# Altium PCB ESP8266 PCB.PcbDoc
Units mm, origin at the board's own origin, x right, y up, seen from the top; angles counter-clockwise.
Board outline 47.2 x 57.63 mm, 2 copper layers (Top Layer, Bottom Layer), stack 0.27 mm thick; 26 components, 15 nets, 95 pads, 50 vias.
Unrouted connection lines stored in the file: 1.
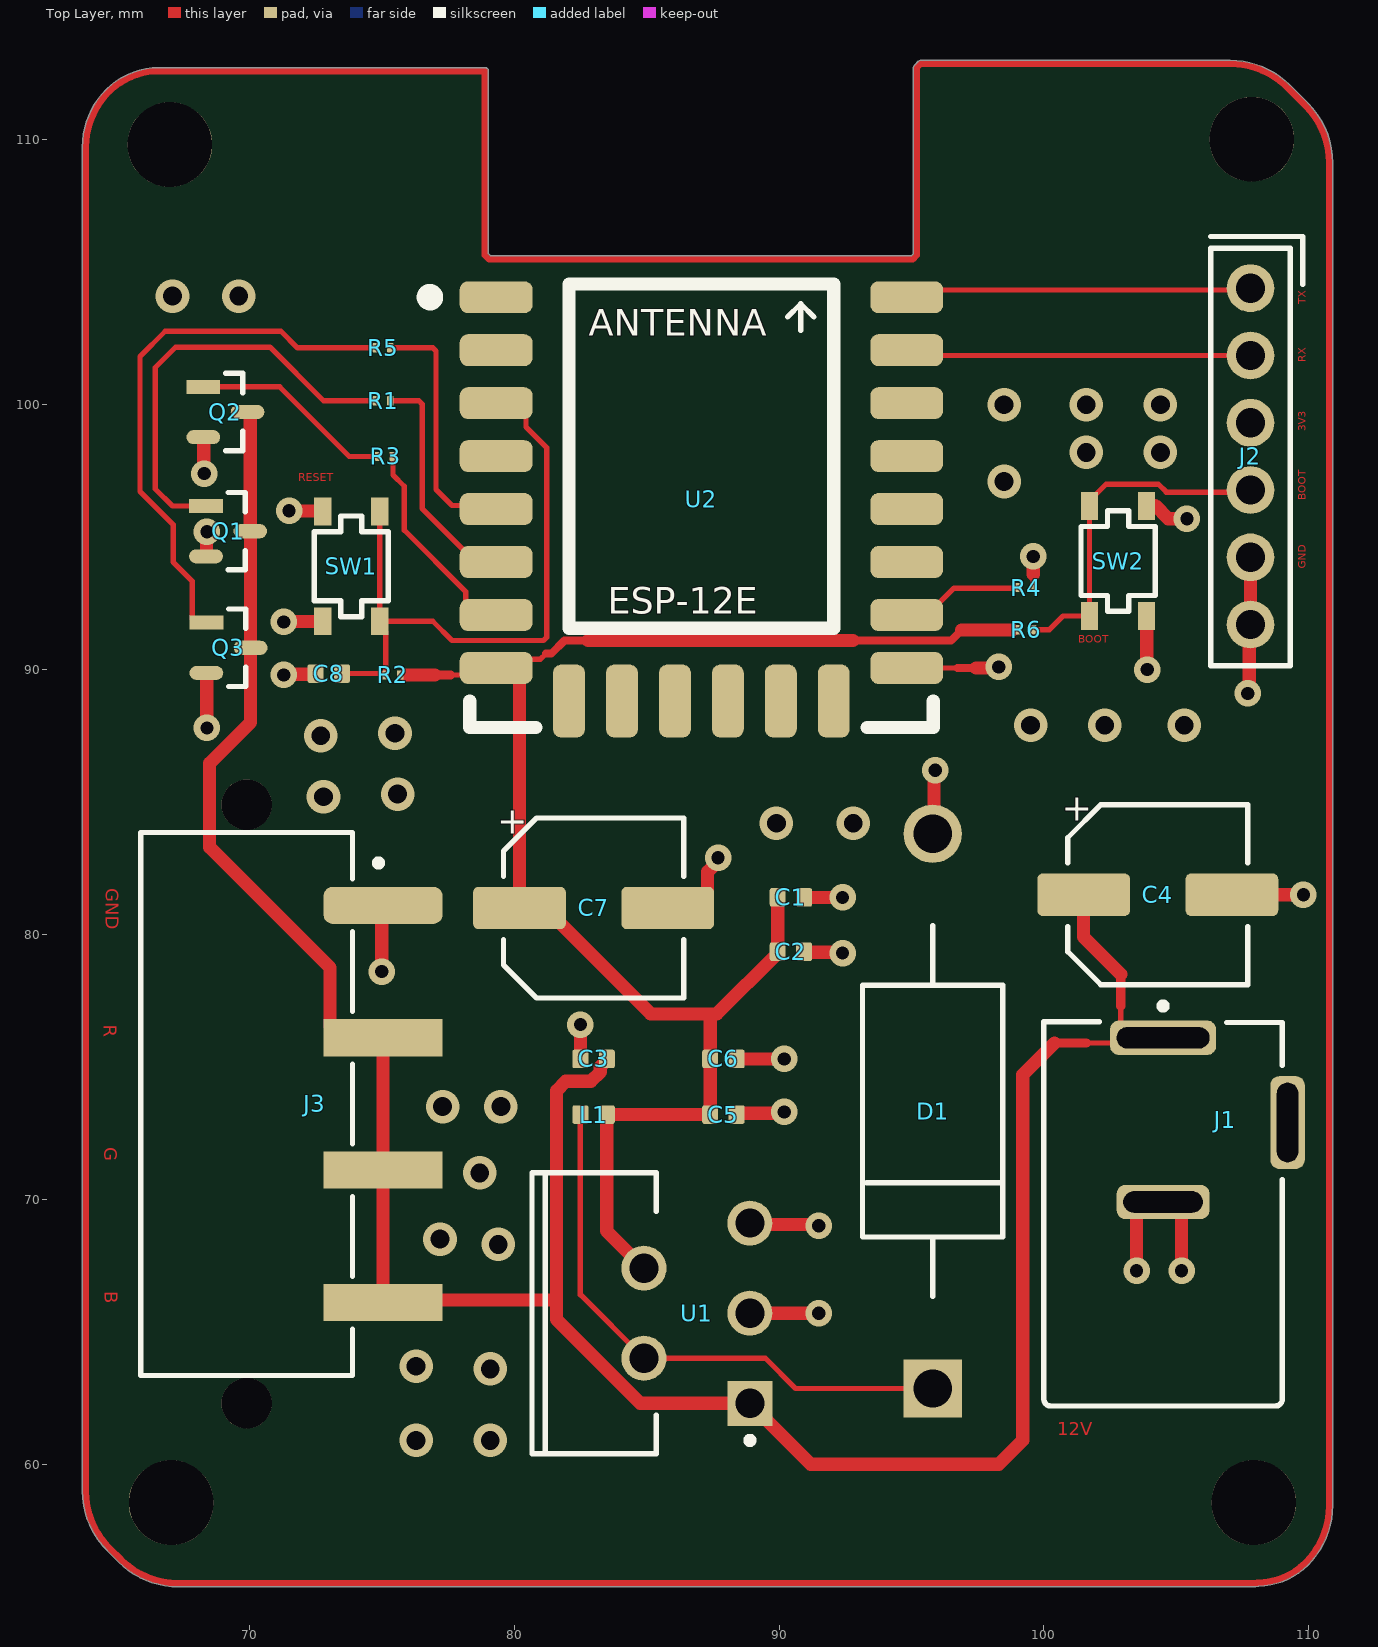
[diagram p0: Top Layer view]
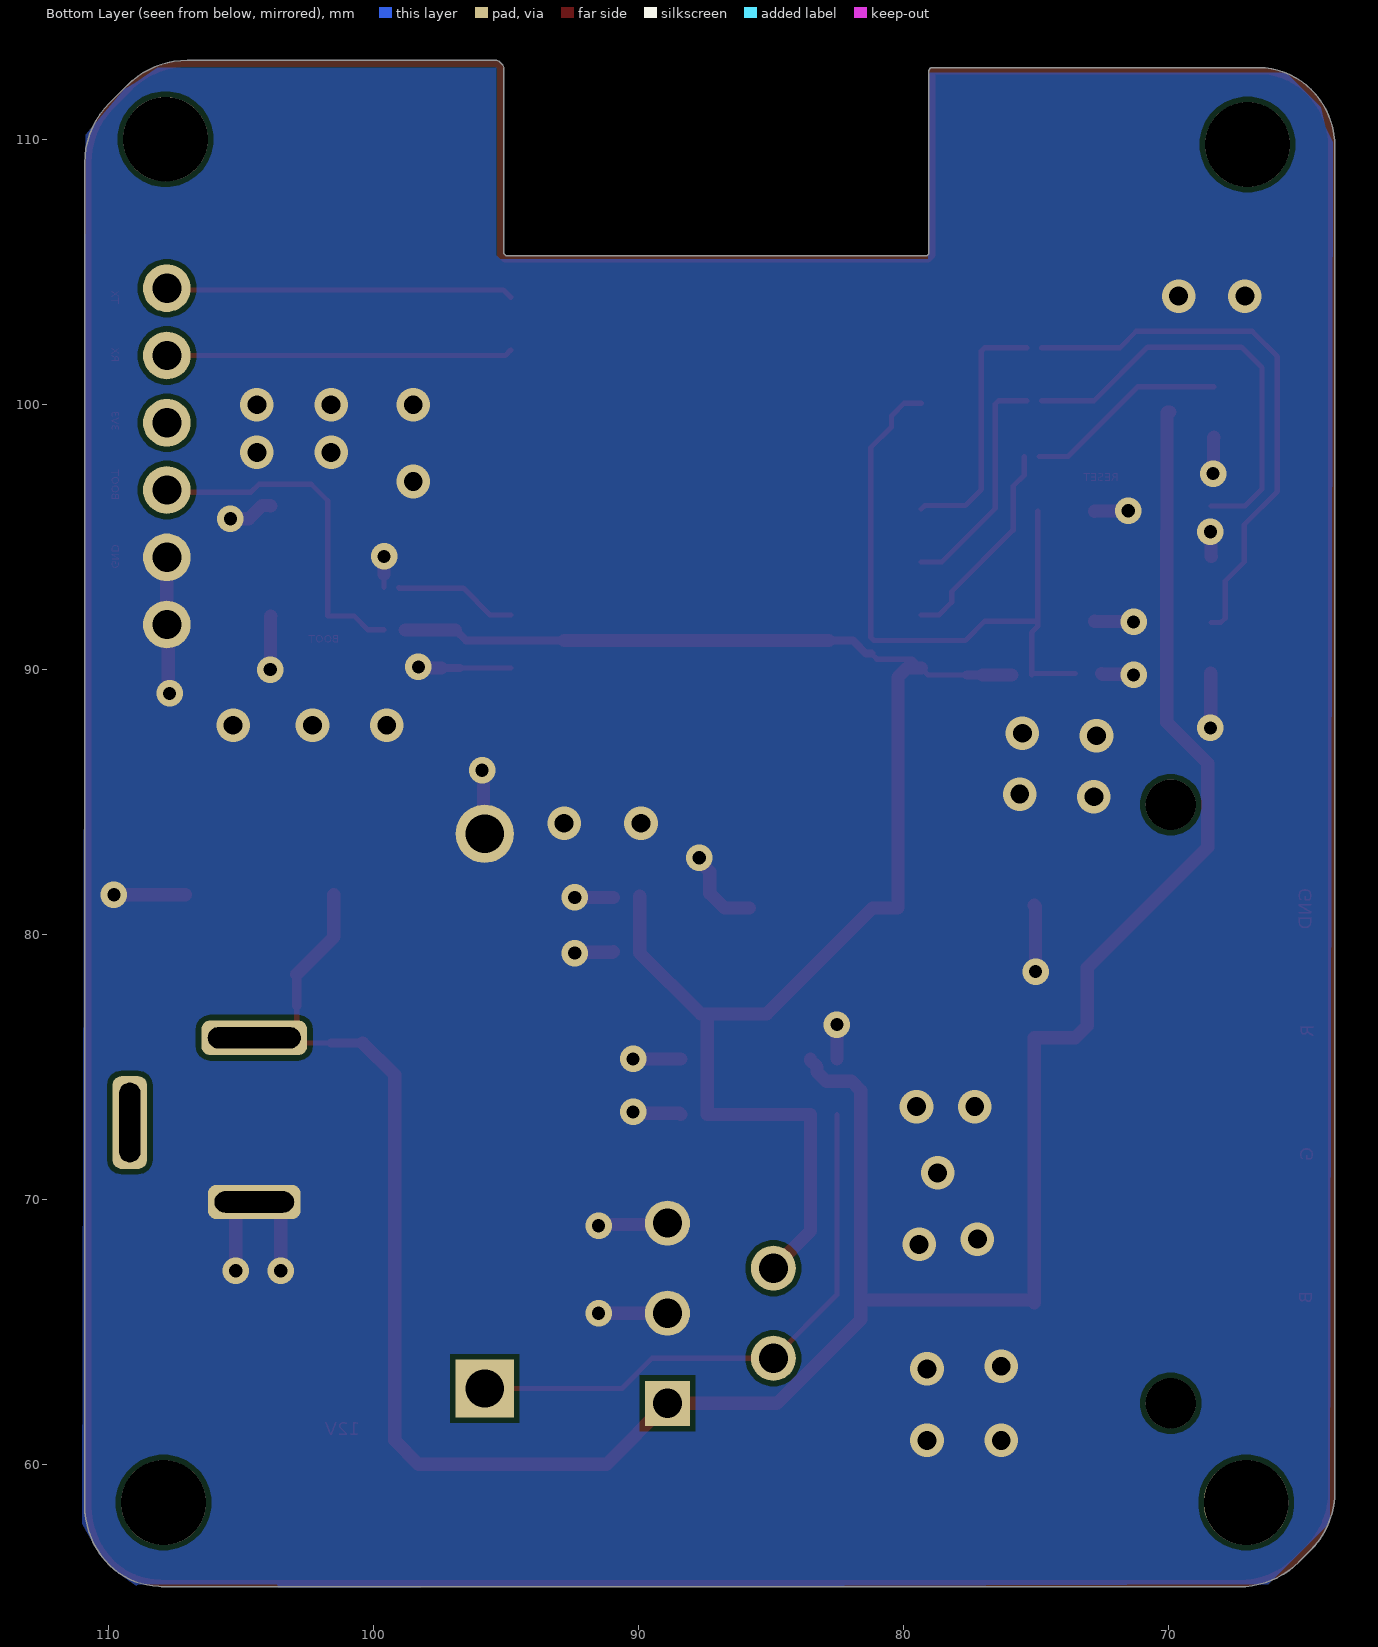
[diagram p1: Bottom Layer view, seen from below]
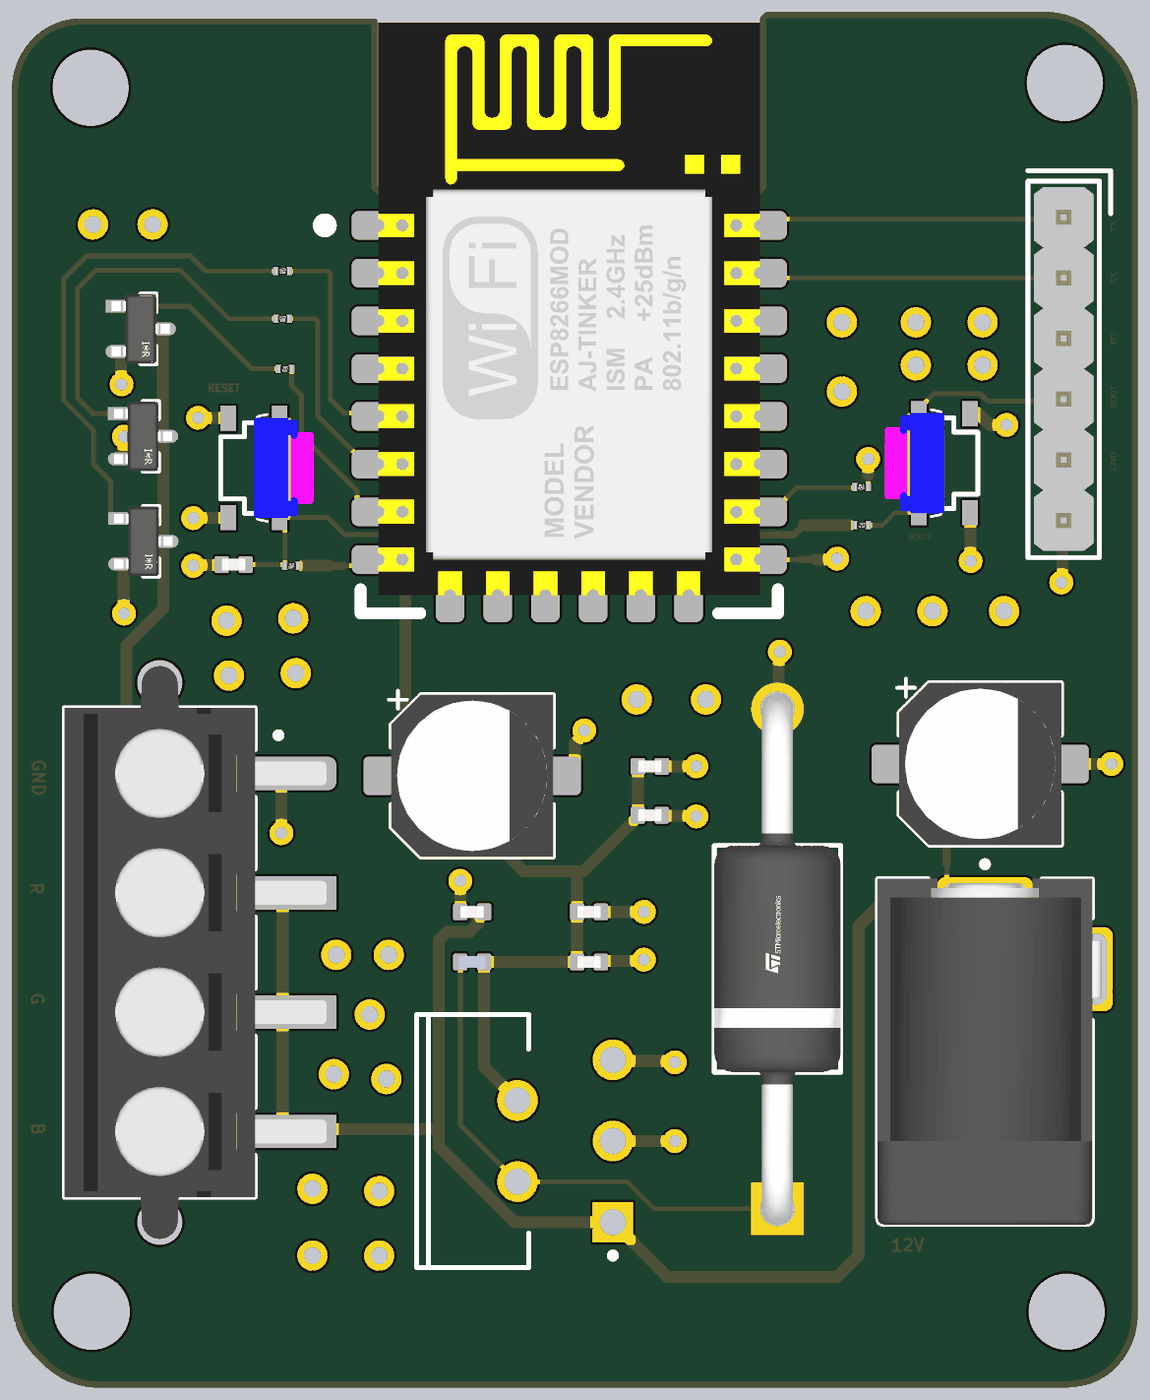
[diagram p2: 3D render of the assembled board from above, using the file's embedded part models]

## Layer stack, top to bottom
Top Solder: solder mask 0.0254, SM-001, Dk 4
Top Layer: signal copper 0.035
Dielectric 1: core 0.2, Core-043, Dk 4.3
Bottom Layer: signal copper 0.035
Bottom Solder: solder mask 0.0254, SM-001, Dk 4

## Board outline
64.633,56.737 cw(c66.891,58.995) 63.698,58.995 63.698,63.167 63.698,106.508 63.698,109.725 cw(c66.782,109.725) 64.601,111.906 cw(c66.583,109.924) 66.583,112.727 67.174,112.727 66.8,112.727 67.549,112.727 67.551,112.727 78.9,112.727 cw(c78.9,112.6) 79.027,112.6 79.027,105.702 79.102,105.627 94.998,105.627 95.073,105.702 95.073,112.726 95.11,112.816 95.259,112.965 95.349,113.002 107.03,113.002 cw(c107.03,109.809) 109.288,112.067 109.967,111.388 cw(c107.709,109.13) 110.902,109.13 110.902,58.445 cw(c107.709,58.445) 109.967,56.187 cw(c108.062,58.092) 108.102,55.398 108.001,55.373 67.32,55.373 cw(c67.32,58.566) 65.062,56.308

## Design rules (kind name [scope] priority, off if disabled: settings)
Clearance [All] p1: gap=0.2 ignorepadtopadclearanceinfootprint=FALSE
PolygonConnect [All] p1: connectstyle=Direct reliefconductorwidth=0.254 reliefentries=4 polygonreliefangle="90 Angle" airgapwidth=0.254
RoutingVias [All] p1: holewidth=0.5 width=1 viastyle="Through Hole" minholewidth=0.5 minwidth=1 maxholewidth=0.711 maxwidth=1.27
SolderMaskExpansion [All] p1: expansion=0.102 istentingtop=FALSE
SupplyNets "Schematic Supply Nets_1" [InNet('GND')] p1: voltage=0.000
UnRoutedNet [All] p1: checkbadconnections=TRUE
Width [All] p1: maxlimit=1 minlimit=0.2 preferedwidth=0.3 minimp=50.000000 maximp=50.000000 favimp=50.000000
29 further rules are at their usual default settings.

## Components (designator, comment, footprint, x,y, rotation, side; value= is the part's Value field where it differs from the comment)
C1 "100n" CAP_0402 90.45,81.4 r0 top
C2 "10u" CAP_0402 90.45,79.35 r0 top
C3 "1u" CAP_0402 83,75.3 r180 top
C4 "220u" CAP_AE_SMD_D6MM3_H5M55 104.3,81.5 r0 top
C5 "4.7u" CAP_0402 87.9,73.2 r0 top
C6 "4.7u" CAP_0402 87.9,75.3 r0 top
C7 "680u" CAP_AE_SMD_D6MM3_H5M55 83,81 r0 top
C8 "1u" CAP_0402 73,89.85 r180 top
D1 "1N5822" FP-DO-201AD-MFG 95.8,73.33 r90 top
J1 "KLDX-0202-A" KYCN-KLDX-0202-A_V 104.5,69.9 r270 top
J2 "G800W302018EU" G800W302018EU 107.8,98.05 r0 top
J3 "691709710304" 691709710304 69.9,73.6 r270 top
L1 "22u" IND_0402 83,73.2 r0 top
Q1 "IRLML6244TRPBF" FP-Micro3-IPC_C 69.2,95.225 r0 top
Q2 "IRLML6244TRPBF" FP-Micro3-IPC_C 69.1,99.725 r0 top
Q3 "IRLML6244TRPBF" FP-Micro3-IPC_C 69.215,90.825 r0 top
R1 "1k" RES_0201 75.05,100.15 r180 top
R2 "10k" RES_0201 75.425,89.8 r0 top
R3 "1k" RES_0201 75.15,98.05 r180 top
R4 "10k" RES_0201 99.325,93.1 r0 top
R5 "1k" RES_0201 75.05,102.15 r180 top
R6 "10k" RES_0201 99.325,91.5 r180 top
SW1 "RESET" SKRPANE010 73.85,93.9 r270 top
SW2 "BOOT" SKRPANE010 102.8,94.1 r90 top
U1 "LM2596T-3.3/NOPB" NDH0005A 86.9,65.7 r90 top
U2 "ESP-12E" ESP-12E 87.07,100.562 r0 top

## Footprints (in the part's own frame and the unit in brackets; to place one, negate y for a bottom-side part, rotate by r counter-clockwise, add the part's x,y. Pads: shape width x height; smd on the part's side, far side on the other; paste and mask are expansions set on the pad)
691709710304 [mm] "Horizontal Entry SMT with Pressure Clamp, pitch 5mm, 04p"
  rrect50% 1.4x4.5 smd: 1(-7.5,5.15)
  rect 1.4x4.5 smd: 2(-2.5,5.15) 3(2.5,5.15) 4(7.5,5.15)
  round 1.9 hole 1.9 unplated: M1(-11.3,0) M2(11.3,0)
  silkscreen extent -10.25,-4 10.25,5.1, body extent -12,-4 12,7, height 9.95
CAP_0402 [mm]
  rrect25% 0.6x0.7 smd: 1(-0.5,0) 2(0.5,0)
  body extent -0.5,-0.26 0.5,0.26, height 0.37
CAP_AE_SMD_D6MM3_H5M55 [mm] "Aluminum Electrolytic Capacitor, Body 6.30x6.60x5.50mm, IPC Low Density"
  rrect25% 3.5x1.6 smd: 1(-2.8,0) 2(2.8,0)
  silkscreen extent -3.4,-3.4 3.4,3.4, body extent -3.4,-3.4 3.4,3.4, height 5.5
ESP-12E [mm]
  rrect50% 2.75x1.2 smd: 1(-7.75,3.5) 2(-7.75,1.5) 3(-7.75,-0.5) 4(-7.75,-2.5) 5(-7.75,-4.5) 6(-7.75,-6.5) 7(-7.75,-8.5) 8(-7.75,-10.5) 15(7.75,-10.5) 16(7.75,-8.5) 17(7.75,-6.5) 18(7.75,-4.5) 19(7.75,-2.5) 20(7.75,-0.5) 21(7.75,1.5) 22(7.75,3.5)
  rrect50% 1.2x2.75 smd: 9(-5,-11.75) 10(-3,-11.75) 11(-1,-11.75) 12(1,-11.75) 13(3,-11.75) 14(5,-11.75)
  silkscreen extent -10.5,-12.75 8.75,4, body extent -8.01,-12.01 8.01,12, height 2.66
FP-DO-201AD-MFG [mm]
  rect 2.2x2.2 hole 1.45 paste-2539.97 mask+0: 1(-10.47,0)
  round 2.2 hole 1.45 paste-2539.97 mask+0: 2(10.47,0)
  silkscreen extent -7,-2.65 7,2.65, body extent -11.67,-2.75 11.67,2.75, height 0.25
FP-Micro3-IPC_C [mm]
  rect 1.274x0.532 smd paste+0 mask+0: 1(-0.835,0.95)
  rrect100% 1.274x0.532 smd paste+0 mask+0: 2(-0.835,-0.95) 3(0.835,0)
  silkscreen extent 0,-1.46 0.65,1.46, body extent -1.57,-1.56 1.57,1.56, height 0.25
G800W302018EU [mm]
  round 1.8 hole 1.1 mask+0.07: 1(0,6.35) 2(0,3.81) 3(0,1.27) 4(0,-1.27) 5(0,-3.81) 6(0,-6.35)
  silkscreen extent -1.5,-7.9 1.97,8.3, body extent -1.25,-7.62 1.25,7.62, height 8.61
IND_0402 [mm]
  rrect25% 0.6x0.7 smd: 1(-0.5,0) 2(0.5,0)
  body extent -0.56,-0.26 0.56,0.26, height 0.67
KYCN-KLDX-0202-A_V [mm] "Power Jack, 3-Leads, Body 14.5x9mm"
  rrect50% 1.3x4 hole 0.8 slot 3.5 at 90 deg: 1(-6.2,0)
  rrect50% 1.3x3.5 hole 0.8 slot 3 at 90 deg: 2(0,0)
  rrect50% 3.5x1.3 hole 0.8 slot 3 at 0 deg: 3(-3,4.7)
  silkscreen extent -7.52,-4.5 7.7,4.5, body extent -6.8,-4.5 7.7,4.9, height 10.8
NDH0005A [mm] "FM, 5-Leads, Body 10.6x4.7mm, Pitch 1.7mm"
  rect 1.7x1.7 hole 1.1: 1(-3.4,-2)
  round 1.7 hole 1.1: 2(-1.7,2) 3(0,-2) 4(1.7,2) 5(3.4,-2)
  silkscreen extent -5.3,-2.13 5.3,6.23, body extent -5.35,-2.31 5.35,6.28, height 21.1
RES_0201 [mm]
  rrect25% 0.25x0.35 smd mask+0.05: 1(-0.275,0) 2(0.275,0)
  body extent -0.3,-0.15 0.3,0.15, height 0.15
SKRPANE010 [mm]
  rect 1.05x0.65 smd: 12(-2.075,1.075) 12(2.075,1.075) 34(-2.075,-1.075) 34(2.075,-1.075)
  silkscreen extent -1.9,-1.4 1.9,1.4, body extent -2.3,-1.6 2.3,1.6, height 2.51

## Part data
C1 C2 C3 C5 C6 C8: library part CAP_0402, "Capacitor SMD 0402"
C4 C7: library part CAP_ALEL_6.3x5.5, "Capacitor SMD Aluminium Electrolytic 6.3mm Diameter 5.5mm Height"
D1: library part CMP-12187-000025-1, "DIODE SCHOTTKY 40V 3A DO201AD", Forward Current=3A, Manufacturer=STMicroelectronics, Max Junction Temp=+150°C, Max Repetitive Reverse Voltage=40V, Max Surge Forward Current=80A, Package=DO-201AD, Peak Reverse Current=2mA, Temperature="to +150°C", Automotive=No, Category=Diode, ComponentLink2Description=Datasheet, ComponentLink2URL=https://www.st.com/resource/en/datasheet/1n5822.pdf, Device Class L1="Discrete Semiconductors", Device Class L2=Diodes, Device Class L3="Schottky Diodes", Digikey Description="DIODE SCHOTTKY 40V 3A DO201AD", Height=5.3mm, Lead Free=Yes, Manufacturer Part Number=1N5822, Mouser Description="Schottky Diodes & Rectifiers Vr/40V Io/3A BULK", Octopart=https://octopart.com/1n5822-stmicroelectronics-323225, RoHS=TRUE, Temperature Range High=+150°C
J1: library part CMP-1673-00001-5, "DC Power Jack, 24 V, 3.5 A, -25 to 85 degC, 3-Pin THD, RoHS", Colour=Black, Current Rating="3.5 A", Manufacturer=Kycon, Max Operating Temperature="85 degC", Min Operating Temperature="-25 degC", Package Quantity=500, Voltage Rating="24 V", ComponentLink1Description="Manufacturer URL", ComponentLink1URL=http://www.kycon.com/, ComponentLink2Description=Datasheet, ComponentLink2URL=http://www.kycon.com/Pub_Eng_Draw/KLDX-0202-X.PDF, Connector Type=Power, Contact Gender=Female, Contact Material=Brass, Contact Plating=Tin, DatasheetVersion="Rev. D3, 06/2013", Height="10.8 mm", Housing Material=PBT, Length="9.2 mm", Mount="Through Hole", Mounting Technology="Through Hole", PackageDescription="3-Pin Through Hole Device, Body 14.5 x 9 mm", PackageReference=KLDX-0202-A, Pins=2, RoHSCompliant=true
J2: "Pin Header 6 Position 2.54mm Pitch", Manufacturer=Amphenol, Manufacturer Part Number=G800W302018EU
J3: library part CMP-1502-03337-2, Color=Black, Current=6A, Flammability Rating="UL94 V-0", Max Operating Temperature=130°C, Min Operating Temperature=-40°C, Voltage=300V, Connector Type=Screw, Contact Material=Nickel, Contact Plating=Tin, Current Rating=6A, Height=10.2mm, Housing Material=Nylon, Lead Pitch=5mm, Length=20mm, Mount="Surface Mount", NexarPartId=34171771, Number of Contacts=4, Number of Levels=1, Number of Pins=4, Number of Positions=4, Number of Positions Per Level=4, Number of Rows=1, Packaging=Digi-Reel®, Pitch=5mm, Plating=Steel, REACH SVHC=Unknown, RoHS=Compliant, Termination=Screw, Voltage Rating=300V, Wire Gauge (Max)=30AWG, Wire Gauge (Min)=30AWG, Wire/Cable Gauge=30AWG
L1: library part IND_0402, "Inductor SMD 0402"
Q1 Q2 Q3: library part CMP-32901-000185-1, "MOSFET N-CH 20V 6.3A SOT-23", Case/Package=SOT-23, Continuous Drain Current (ID)=6.3A, Drain to Source Voltage (Vdss)=20V, Input Capacitance=700pF, Max Operating Temperature=150°C, Max Power Dissipation=1.3W, Min Operating Temperature=-55°C, Threshold Voltage=900mV, Halogen Free="Halogen Free", Lead Free="Lead Free", Max Dual Supply Voltage=20V, Mount="Surface Mount", Number of Pins=3, Packaging="Tape and Reel", Rds On Max=21mR, REACH SVHC="No SVHC"
R1 R2 R3 R4 R5 R6: library part RES_0201, "Resistor SMD 0201"
SW1 SW2: library part SKRPANE010, "Tactile Switch SMD SPST", Manufacturer="Alps Alpine", Manufacturer Part Number=SKRPANE010
U1: library part CMP-0069-01930-3, "SIMPLE SWITCHER® Power Converter 150 KHz 3A Step-Down Voltage Regulator, 5-pin TO-220, Pb-Free", Manufacturer="Texas Instruments", PackageTopMarking="NSUZXYTTE#*LM2596T*-3.3 P+", PowerWise=N, ComponentLink1Description="Datasheet URL", ComponentLink1URL=http://www.ti.com/general/docs/lit/getliterature.tsp?genericPartNumber=LM2596&fileType=pdf, CompType=Switcher, PackageDescription="TO-220, Molded, Stagger Bend, 5 Lead", PackageReference=NDH0005A, PinCount=5, RoHS=Y
U2: "ESP8266 ESP-12E Module (ESP8266, Castellated Holes)", Manufacturer=AI-THINKER, Manufacturer Part Number=ESP-12E

## Free pads (board coordinates)
  round 3.2 hole 3.2 unplated: MH(67,109.825) MH(67.05,58.55) MH(107.85,110.025) MH(107.925,58.55)

## Via types
v1: diameter 1.27, hole 0.711, Top Layer to Bottom Layer, 26 vias
v2: diameter 1, hole 0.5, Top Layer to Bottom Layer, 24 vias

## Nets (pads, with @x,y where several pads share a name; then routed paths per layer and width w, separated by ;. In a path a pad name is that pad's centre, name@x,y a point inside that pad or via, vN(x,y) a via of type N, cw(c..) or ccw(c..) an arc to the next point about the centre after c; other vN are vias at no path point)
3.3V: C1.1 C2.1 C5.1 C6.1 C7.1 J2.3 L1.2 R2.2 R6.2 U1.4 U2.8 | length 61.9
  Top Layer w0.2: 77.6,89.8 79.058,89.8 U2.8 79.653,90.395 80.995,90.395 81.2,90.6
  Top Layer w0.3: 81.2,90.6 81.4,90.6 81.9,91.1 82.8,91.1 ; 92.797,91.1 96.5,91.1 96.9,91.5
  Top Layer w0.35: 77,89.8 77.6,89.8
  Top Layer w0.5: 75.9,89.8 77,89.8 ; U2.8 79.854,90.062 80.2,89.716 C7.1 81.15,81 85.15,77 87.4,77 ; 82.8,91.1 92.797,91.1 ; U1.4 83.5,68.8 L1.2 C5.1 C6.1 87.4,77 ; C1.1@89.95,81.45 C1.1 C2.1 89.95,79.3 87.65,77 87.4,77 ; 96.9,91.5 98.804,91.5
12V: C3.1 C4.1 J1.1 J3.2 J3.3 J3.4 Q1.3 Q2.3 Q3.3 U1.1 | length 102.9
  Top Layer w0.2: 101.6,75.9 104.3,75.9 J1.1 103.433,76.1 102.9,76.633 102.9,77.3
  Top Layer w0.35: 100.4,75.9 101.6,75.9 ; 102.9,77.3 102.9,78.5
  Top Layer w0.5: Q2.3 70.02,99.725 70.035,99.71 Q1.3 70.05,95.21 Q3.3 70.05,88.014 68.5,86.464 68.5,83.29 73.05,78.74 73.05,76.55 73.5,76.1 J3.2 J3.3 J3.4 75.15,66.2 81.6,66.2 ; C3.1 83.5,75.25 83.25,75 83.25,74.808 82.9,74.457 81.95,74.457 81.6,74.107 81.6,66.2 ; 100.4,75.9 99.2,74.7 99.2,60.9 98.3,60 91.2,60 U1.1 84.761,62.3 81.6,65.461 81.6,66.2 ; C4.1 101.5,79.9 102.9,78.5
BOOT: J2.4 R6.1 SW2.12 | length 13.2
  Top Layer w0.2: R6.1 100.2,91.5 100.725,92.025 101.725,92.025 101.725,96.375 102.35,97 104.324,97 104.624,96.7 107.72,96.7 J2.4
GND: C1.2 C2.2 C3.2 C4.2 C5.2 C6.2 C7.2 C8.2 D1.2 J1.2 J2.5 J2.6 J3.1 Q1.2 Q2.2 Q3.2 R4.2 SW1.34 SW2.34 U1.3 U1.5 U2.15 | length 52.5
  Top Layer w0.2: U2.15 96.738,90.062 ; R4.2 99.6,93.6
  Top Layer w0.3: 96.738,90.062 97.438,90.062
  Top Layer w0.5: Q2.2 68.268,98.775 68.282,98.76 68.282,97.418 v2(68.3,97.4) ; Q1.2 68.368,94.275 68.382,94.29 68.382,95.191 v2(68.4,95.209) ; Q3.2 68.39,89.865 68.39,87.81 v2(68.4,87.8) ; v2(71.3,89.8) 71.325,89.825 72.475,89.825 C8.2 ; v2(71.3,91.8) 71.312,91.812 72.762,91.812 SW1.34@72.775,91.825 ; v2(71.5,96) 71.513,95.987 72.762,95.987 SW1.34@72.775,95.975 ; v2(75,78.6) 75,81.05 J3.1 ; C3.2 v2(82.5,76.6) ; C7.2 86.75,81 87.3,81.55 87.3,82.365 87.7,82.765 v2(87.7,82.9) ; C5.2 88.45,73.25 90.15,73.25 v2(90.2,73.3) ; C6.2 v2(90.2,75.3) ; U1.3 v2(91.5,65.7) ; U1.5 88.95,69.05 91.45,69.05 v2(91.5,69) ; C2.2 90.975,79.325 92.375,79.325 v2(92.4,79.3) ; C1.2 v2(92.4,81.4) ; D1.2 95.85,83.85 95.85,86.15 v2(95.9,86.2) ; 97.438,90.062 98.262,90.062 v2(98.3,90.1) ; 99.6,93.6 v2(99.6,94.275) ; v2(103.5,67.3) 103.5,69.506 103.894,69.9 J1.2 104.806,69.9 105.2,69.506 v2(105.2,67.3) ; SW2.34@103.875,92.025 103.887,92.013 103.887,90.013 v2(103.9,90) ; SW2.34@103.875,96.175 103.9,96.2 104.2,96.2 104.7,95.7 v2(105.4,95.7) ; C4.2 v2(109.8,81.5) ; v2(107.7,89.1) 107.75,89.15 107.75,91.65 J2.6 J2.5
  other v1: 76.3,60.9 79.1,60.9 79.1,63.6 76.3,63.7 79.4,68.3 77.2,68.5 78.7,71 77.3,73.5 79.5,73.5 89.9,84.2 92.8,84.2 72.8,85.2 75.6,85.3 72.7,87.5 75.5,87.6 99.5,87.9 102.3,87.9 105.3,87.9 98.5,97.1 101.6,98.2 104.4,98.2 98.5,100 101.6,100 104.4,100 67.1,104.1 69.6,104.1
NetD1_1: D1.1 L1.1 U1.2 | length 21.6
  Top Layer w0.2: L1.1 82.5,66.4 U1.2 89.483,64 90.623,62.86 D1.1
NetQ1_1: Q1.1 R1.2 | length 16.2
  Top Layer w0.2: Q1.1 67.1,96.175 66.45,96.825 66.45,101.4 67.225,102.175 70.775,102.175 72.8,100.15 R1.2
NetQ2_1: Q2.1 R3.2 | length 7.7
  Top Layer w0.2: Q2.1 71.15,100.675 73.775,98.05 R3.2
NetQ3_1: Q3.1 R5.2 | length 20.9
  Top Layer w0.2: Q3.1 68.009,91.775 67.843,91.941 67.843,93.349 67.125,94.067 67.125,95.475 65.875,96.725 65.875,101.825 66.825,102.775 71.2,102.775 71.825,102.15 R5.2
NetR1_1: R1.1 U2.6 | length 8.8
  Top Layer w0.2: R1.1 76.4,100.15 76.525,100.025 76.525,96.082 78.545,94.062 U2.6
NetR3_1: R3.1 U2.7 | length 8
  Top Layer w0.2: R3.1 75.425,97.35 75.85,96.925 75.85,95.265 78.168,92.947 78.168,92.547 78.653,92.062 U2.7
NetR4_1: R4.1 U2.16 | length 4.7
  Top Layer w0.2: U2.16 95.595,92.062 96.608,93.075 99.025,93.075 R4.1
NetR5_1: R5.1 U2.5 | length 9.6
  Top Layer w0.2: R5.1 76.933,102.15 77.05,102.033 77.05,96.8 77.65,96.2 79.182,96.2 U2.5
RESET: C8.1 R2.1 SW1.12 U2.3 | length 24.6
  Top Layer w0.2: C8.1 75.125,89.85 75.15,89.825 R2.1 75.15,91.4 74.925,91.625 SW1.12@74.925,91.825 ; SW1.12@74.925,95.975 SW1.12@74.925,91.825 ; U2.3 79.959,100.062 80.444,99.577 80.444,99.162 81.225,98.38 81.225,91.217 81.108,91.1 77.65,91.1 76.925,91.825 SW1.12@74.925,91.825
RX: J2.2 U2.21 | length 13.1
  Top Layer w0.2: U2.21 95.021,101.861 107.799,101.861 J2.2
TX: J2.1 U2.22 | length 13.1
  Top Layer w0.2: U2.22 95.089,104.331 107.731,104.331 J2.1
pads on no net: J1.3 J3.M1 J3.M2 U2.1 U2.2 U2.4 U2.9 U2.10 U2.11 U2.12 U2.13 U2.14 U2.17 U2.18 U2.19 U2.20
copper on no net: | length 217.2
  Top Layer w0.254: 66.8,112.6 67.549,112.6 70.2,112.6 78.9,112.6 78.9,111.93 78.9,111 78.9,105.649 79.049,105.5 95.051,105.5 95.2,105.649 95.2,107.34 95.2,112.726 95.349,112.875 106.925,112.875 107.03,112.875 cw(c107.03,109.809) 109.198,111.977 109.877,111.298 cw(c107.709,109.13) 110.775,109.13 110.775,58.445 cw(c107.709,58.445) 109.877,56.277 cw(c108.062,58.092) 108.062,55.525 cw(c108.001,55.585) 108.001,55.5 106.85,55.5 68.705,55.5 67.32,55.5 cw(c67.32,58.566) 65.152,56.398 64.723,56.827 cw(c66.891,58.995) 63.825,58.995 63.825,59.175 63.825,63.167 63.825,106.508 63.825,109.725 cw(c66.782,109.725) 64.691,111.816 cw(c66.583,109.924) 66.583,112.6 67.174,112.6

## Polygon pours and split planes (outlines as drawn)
GND on Bottom Layer "GND_L02_P001" (solid, pour order 1): 103.774,55.339 66.226,55.461 63.904,57.782 63.784,109.924 64.062,110.502 64.237,111.227 65.537,112.527 78.987,112.527 79.061,112.453 79.061,105.502 95.212,105.502 95.361,105.65 95.361,112.728 108.161,112.728 108.962,112.177 109.41,111.904 110.858,110.194 110.991,57.756 110.337,56.577 109.964,56.204 109.724,55.965 108.962,55.402 108.887,55.477 103.637,55.477

## Other copper
Top Layer:
  text "TX" at 110,103.8 h0.5 r90
  text "RX" at 110,101.6 h0.5 r90
  text "3V3" at 110,99 h0.5 r90
  text "RESET" at 71.855,97.105 h0.3
  text "BOOT" at 109.999,96.4 h0.5 r90
  text "GND" at 110,93.8 h0.5 r90
  text "BOOT" at 101.3,90.9 h0.5
  text "GND" at 64.575,81.75 h0.5 r270
  text "R" at 64.5,76.6 h0.5 r270
  text "G" at 64.525,71.975 h0.5 r270
  text "B" at 64.55,66.525 h0.5 r270
  text "12V" at 100.5,61.1 h0.5

## Text inside footprints (layer, text, board x,y; h text height)
C4: Mechanical 13 "+" at 100.667,84.3 h1; Top Overlay "+" at 100.667,84.3 h1
C7: Mechanical 13 "+" at 79.367,83.8 h1; Top Overlay "+" at 79.367,83.8 h1
U2: Mechanical 13 "ANTENNA / KEEP-OUT" at 81.122,107.473 h1.5; Top Overlay "ANTENNA" at 82.82,102.612 h1